# Altium PCB L-40-LYH_2020-09-11_09-57-17.pcbdoc
Units mil, origin at the board's own origin, x right, y up, seen from the top; angles counter-clockwise.
Board outline 1950 x 3120 mil, 2 copper layers (Top Layer, Bottom Layer); 1 components, 0 nets, 40 pads, 0 vias.
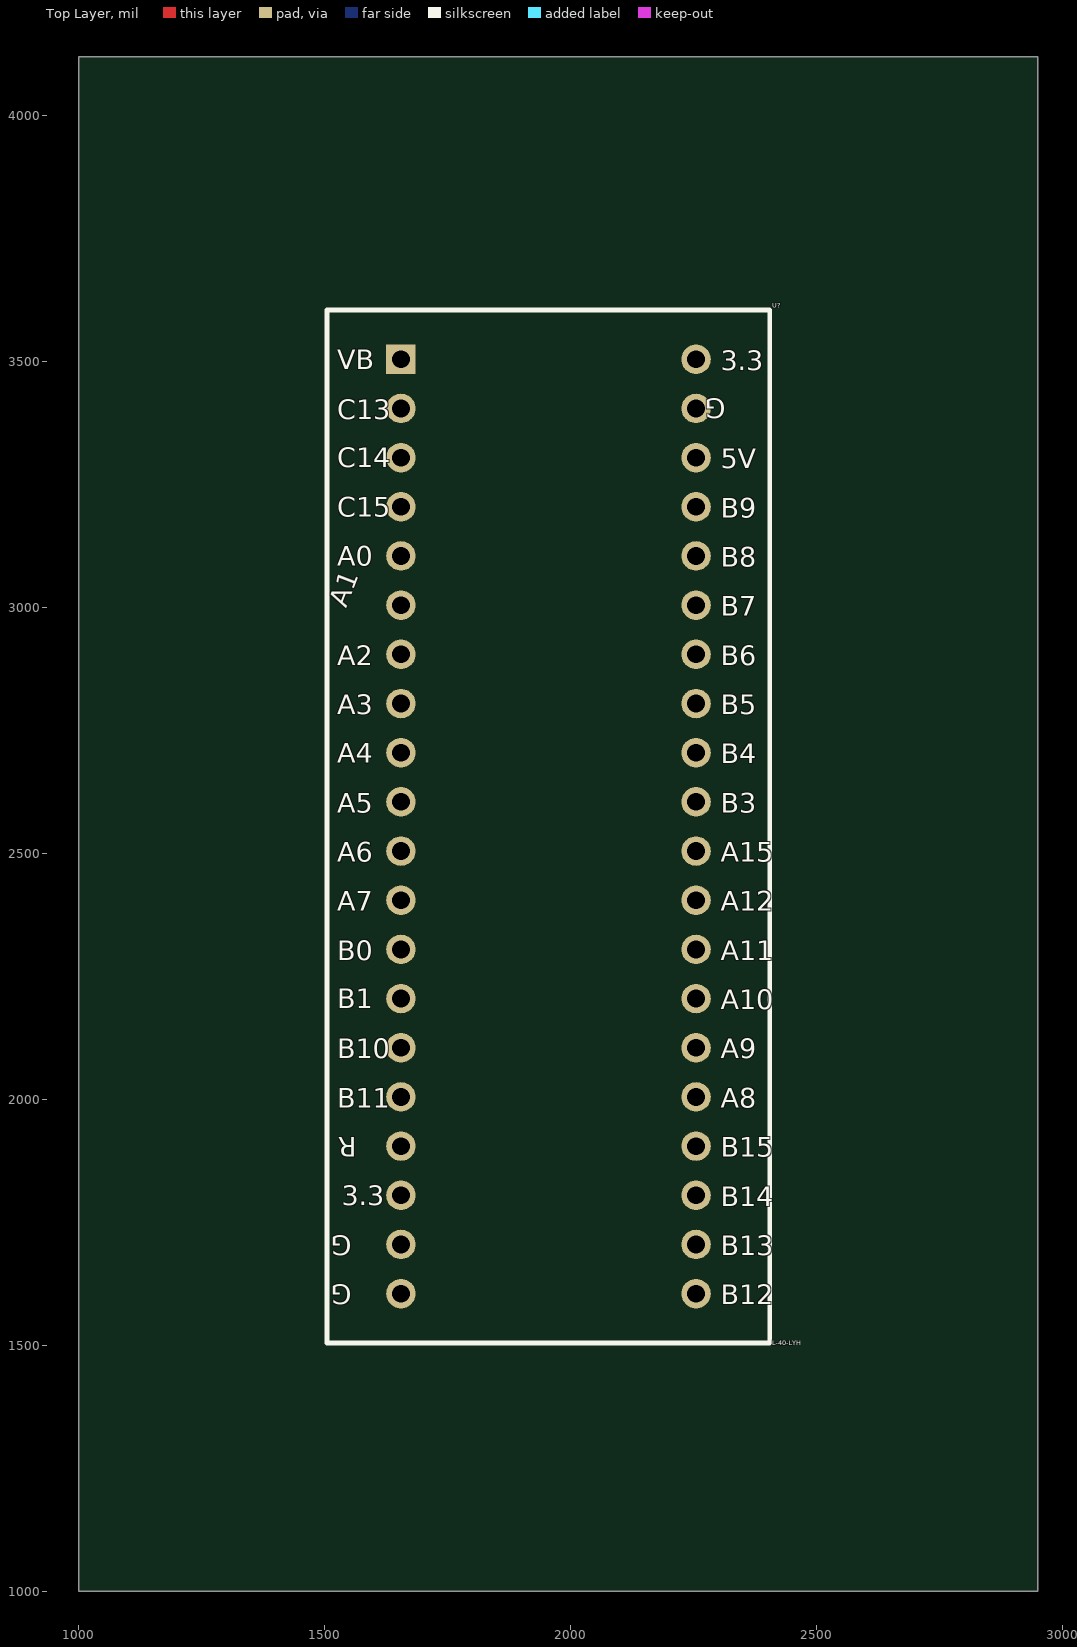
[diagram p0: Top Layer view]
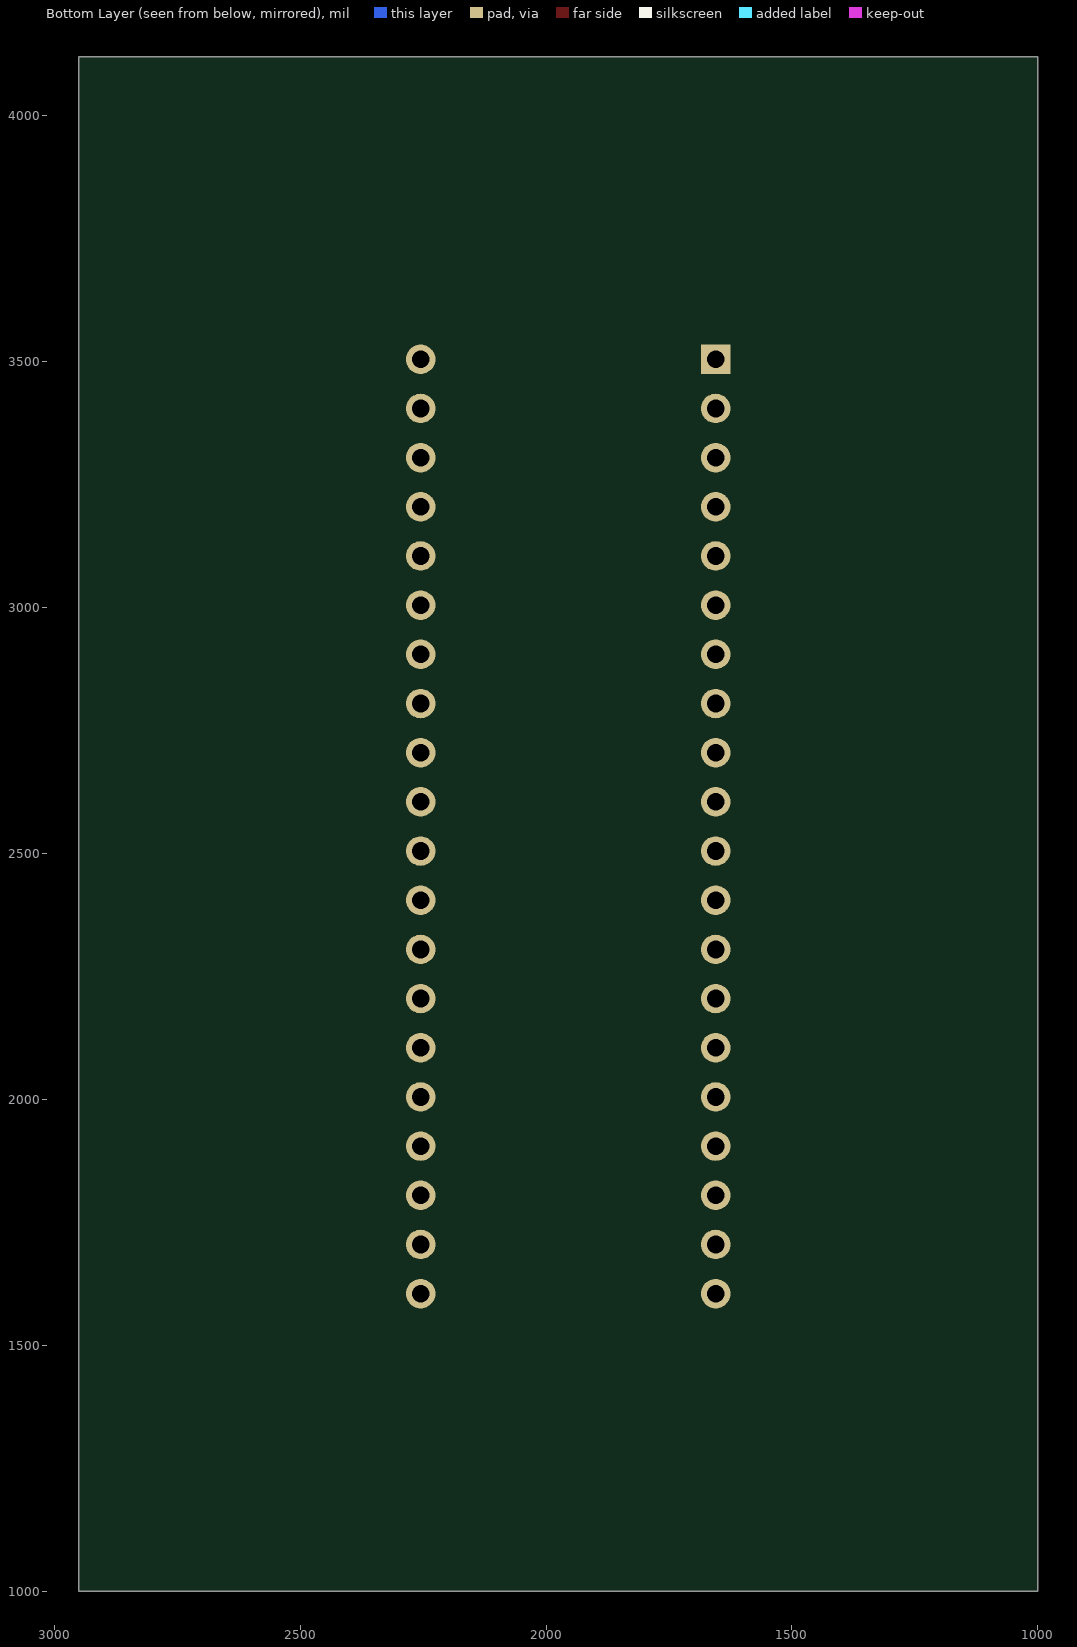
[diagram p1: Bottom Layer view, seen from below]

## Layer stack, top to bottom
Top Layer: signal copper (thickness not stored)
Dielectric: dielectric 12.6, FR-4, Dk 4.8
Bottom Layer: signal copper (thickness not stored)

## Board outline
2950,1000 1000,1000 1000,4120 2950,4120

## Components (designator, comment, footprint, x,y, rotation, side; value= is the part's Value field where it differs from the comment)
U? "L-40-LYH" L-40-LYH 1955,2555 r0 top

## Footprints (in the part's own frame and the unit in brackets; to place one, negate y for a bottom-side part, rotate by r counter-clockwise, add the part's x,y. Pads: shape width x height; smd on the part's side, far side on the other; paste and mask are expansions set on the pad)
L-40-LYH [mil]
  rect 60x60 hole 36: 1(-300,950)
  round 60 hole 36: 2(-300,850) 3(-300,750) 4(-300,650) 5(-300,550) 6(-300,450) 7(-300,350) 8(-300,250) 9(-300,150) 10(-300,50) 11(-300,-50) 12(-300,-150) 13(-300,-250) 14(-300,-350) 15(-300,-450) 16(-300,-550) 17(-300,-650) 18(-300,-750) 19(-300,-850) 20(-300,-950) 21(300,-950) 22(300,-850) 23(300,-750) 24(300,-650) 25(300,-550) 26(300,-450) 27(300,-350) 28(300,-250) 29(300,-150) 30(300,-50) 31(300,50) 32(300,150) 33(300,250) 34(300,350) 35(300,450) 36(300,550) 37(300,650) 38(300,750) 39(300,850) 40(300,950)
  silkscreen extent -450,-1050 450,1050

## Nets (pads, with @x,y where several pads share a name; then routed paths per layer and width w, separated by ;. In a path a pad name is that pad's centre, name@x,y a point inside that pad or via, vN(x,y) a via of type N, cw(c..) or ccw(c..) an arc to the next point about the centre after c; other vN are vias at no path point)
pads on no net: U?.1 U?.2 U?.3 U?.4 U?.5 U?.6 U?.7 U?.8 U?.9 U?.10 U?.11 U?.12 U?.13 U?.14 U?.15 U?.16 U?.17 U?.18 U?.19 U?.20 U?.21 U?.22 U?.23 U?.24 U?.25 U?.26 U?.27 U?.28 U?.29 U?.30 U?.31 U?.32 U?.33 U?.34 U?.35 U?.36 U?.37 U?.38 U?.39 U?.40

## Silkscreen, mask and mechanical layers (free items; w line width, h text height)
Document:
  lines w0.1: 1974,2559 1976,2561

## Text inside footprints (layer, text, board x,y; h text height)
U?: Top Overlay "VB" at 1525,3485 h40; Top Overlay "C13" at 1525,3383.2 h40; Top Overlay "C14" at 1525,3285 h40; Top Overlay "C15" at 1525,3185 h40; Top Overlay "A0" at 1525,3085 h40; Top Overlay "A1" at 1543.67,2997.83 h40 r69; Top Overlay "A2" at 1525,2883.2 h40; Top Overlay "A3" at 1525,2783.2 h40; Top Overlay "A4" at 1525,2685 h40; Top Overlay "A5" at 1525,2583.2 h40; Top Overlay "A6" at 1525,2483.2 h40; Top Overlay "A7" at 1525,2383.2 h40; Top Overlay "B0" at 1525,2283.2 h40; Top Overlay "B1" at 1525,2185 h40; Top Overlay "B10" at 1525,2083.2 h40; Top Overlay "B11" at 1525,1983.2 h40; Top Overlay "R" at 1565,1923.2 h40 r180; Top Overlay "3.3" at 1535,1785 h40; Top Overlay "G" at 1555,1723.2 h40 r180; Top Overlay "G" at 1555,1623.2 h40 r180; Top Overlay "B12" at 2305,1583.2 h40; Top Overlay "B13" at 2305,1683.2 h40; Top Overlay "B14" at 2305,1783.2 h40; Top Overlay "B15" at 2305,1883.2 h40; Top Overlay "A8" at 2305,1983.2 h40; Top Overlay "A9" at 2305,2083.2 h40; Top Overlay "A10" at 2305,2183.2 h40; Top Overlay "A11" at 2305,2283.2 h40; Top Overlay "A12" at 2305,2383.2 h40; Top Overlay "A15" at 2305,2483.2 h40; Top Overlay "B3" at 2305,2583.2 h40; Top Overlay "B4" at 2305,2683.2 h40; Top Overlay "B5" at 2305,2783.2 h40; Top Overlay "B6" at 2305,2883.2 h40; Top Overlay "B7" at 2305,2983.2 h40; Top Overlay "B8" at 2305,3083.2 h40; Top Overlay "B9" at 2305,3183.2 h40; Top Overlay "5V" at 2305,3283.2 h40; Top Overlay "G" at 2315,3425 h40 r180; Top Overlay "3.3" at 2305,3483.2 h40